# Altium PCB Flowmeter.PcbDoc (part 2 of 2)
Units mm, origin at the board's own origin, x right, y up, seen from the top; angles counter-clockwise.
Board outline 90 x 35 mm, 2 copper layers (Top Layer, Bottom Layer); 44 components, 30 nets, 148 pads, 33 vias.
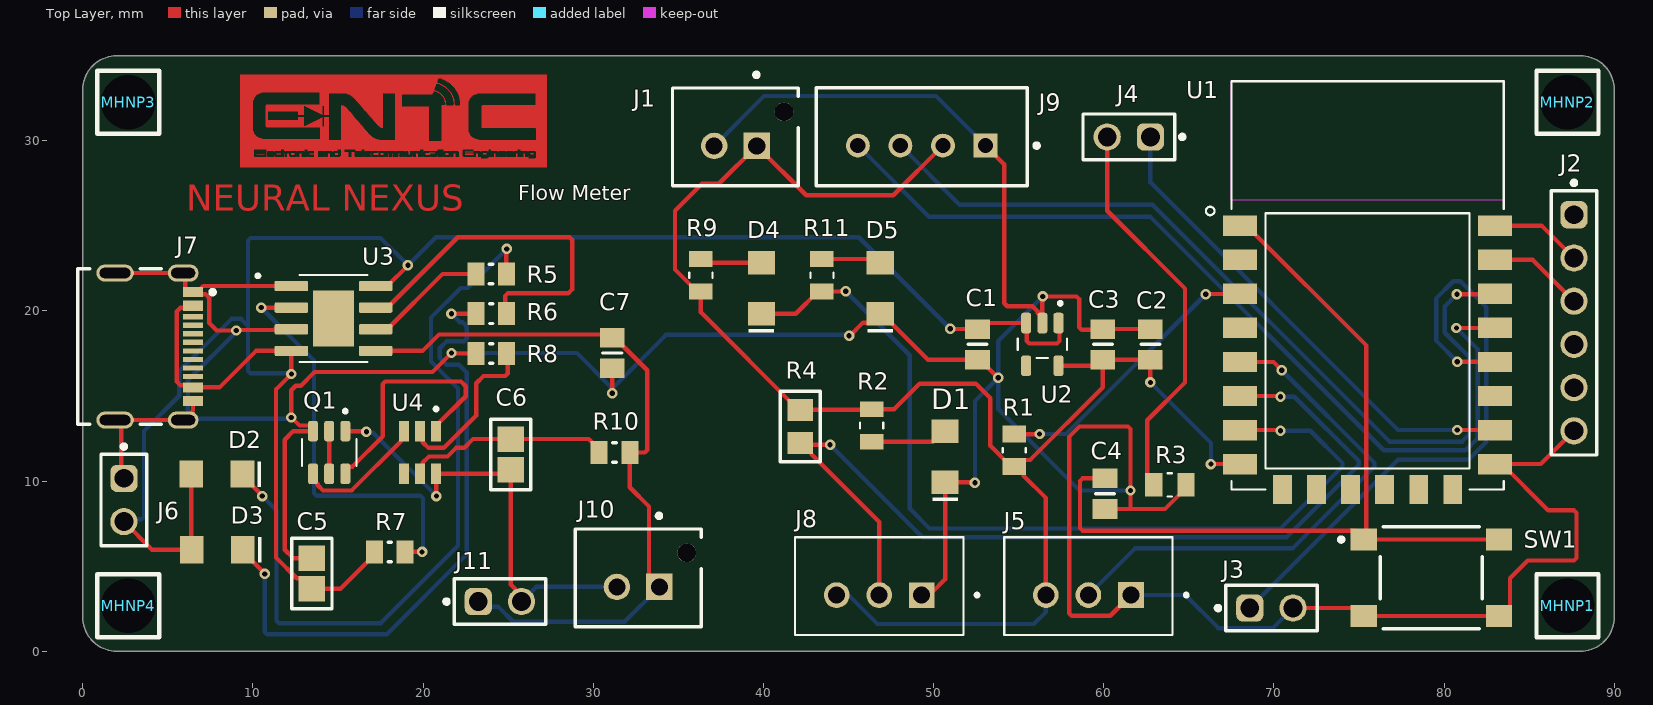
[diagram p0: Top Layer view]

## Via types
v1: diameter 0.61, hole 0.305, Top Layer to Bottom Layer, 33 vias

## Nets (pads, with @x,y where several pads share a name; then routed paths per layer and width w, separated by ;. In a path a pad name is that pad's centre, name@x,y a point inside that pad or via, vN(x,y) a via of type N, cw(c..) or ccw(c..) an arc to the next point about the centre after c; other vN are vias at no path point) (continued)
"VCC 3V3": (continued)
  Top Layer w0.254: J9.2 47.625,26.797 42.508,26.797 J1.1 37.373,27.47 36.381,27.47 34.798,25.886 34.798,22.437 36.092,21.143 R9.2 36.322,19.924 42.062,14.184 R4.2 46.31,14.184 R2.2 47.681,14.229 49.174,15.723 52.48,15.723 53.327,14.876 53.327,12.086 54.552,10.861 R1.1 ; J5.3 56.595,9.003 55.3,10.298 55.3,10.483 54.922,10.861 R1.1 ; U2.5 59.589,16.779 C3.2 ; v1(62.738,15.799) C2.2 ; C2.2@63.336,16.686 62.888,17.134 C2.2 ; v1(66.294,10.998) 66.296,11 U1.8 ; R1.1 55.115,11.239 55.668,11.239 59.944,15.515 C3.2 ; C3.2 C2.2
  Bottom Layer w0.254: J8.3@44.871,3.429 46.7,1.6 55.884,1.6 56.595,2.311 J5.3 ; v1(62.738,15.799) 66.294,12.243 v1(66.294,10.998)
"VCC 5V0": C1.2 C5.2 D2.2 D3.2 J6.2 J7.A4B9 J7.B4A9 R7.1 U2.1 U2.3 U3.4 U3.8 | length 124.8
  Top Layer w0.254: J6.2 4.064,5.969 D3.2 6.374,5.993 D2.2 ; J7.A4B9 6.354,20.188 5.74,20.188 5.517,19.965 5.517,15.849 5.74,15.626 6.354,15.626 J7.B4A9 8.027,15.507 10.173,17.653 U3.4 v1(12.257,16.293) 11.354,15.389 11.354,5.512 12.569,4.297 12.837,4.297 C5.2 15.138,3.671 17.134,5.667 R7.1 ; U3.8 17.892,21.463 19.101,22.672 v1(19.101,22.682) ; v1(50.978,18.948) 50.992,18.934 C1.2 52.933,19.289 U2.3 55.474,19.253 55.474,18.234 55.622,18.085 57.252,18.085 57.4,18.234 57.4,19.227 U2.1
  Bottom Layer w0.254: J6.2 2.543,7.75 3.445,7.75 3.594,7.899 3.594,12.941 5.663,15.01 5.663,16.463 8.733,19.533 9.301,19.533 9.703,19.131 ; v1(12.257,16.293) 12.217,16.332 9.852,16.332 9.703,16.481 9.703,19.131 ; v1(50.978,18.948) 45.593,24.333 20.752,24.333 v1(19.101,22.682) 17.501,24.282 9.852,24.282 9.703,24.134 9.703,19.131
pads on no net: J1. J2.1 J2.4 J2.5 J7.A5 J7.A6 J7.A7 J7.A8 J7.B5 J7.B6 J7.B7 J7.B8 J10. MHNP1. MHNP2. MHNP3. MHNP4. U1.2 U1.4 U1.9 U1.10 U1.11 U1.12 U1.13 U1.14 U1.17 U2.4 U3.9 U4.4

## Other copper
Top Layer:
  region: 12.43,29.246 12.43,29.227 12.43,29.208 12.43,29.188 12.43,29.169 12.276,29.169 12.276,29.188 12.257,29.188 12.257,29.208 12.257,29.227 12.257,29.246 12.257,29.265 12.43,29.265
  region: 20.671,29.265 20.421,29.265 20.421,29.246 20.402,29.246 20.402,29.227 20.402,29.208 20.402,29.188 20.402,29.169 20.152,29.169 20.152,29.188 20.152,29.208 20.152,29.227 20.152,29.246 20.152,29.265 20.363,29.265 20.363,29.285 20.671,29.285
  region: 22.944,29.208 22.944,29.188 22.944,29.169 22.924,29.169 22.924,29.188 22.482,29.188 22.482,29.208 22.482,29.227 22.944,29.227
  region: 22.944,29.342 22.944,29.323 22.482,29.323 22.482,29.342 22.482,29.362 22.944,29.362
  region: 16.955,29.188 16.955,29.169 16.686,29.169 16.686,29.188 16.917,29.188 16.917,29.208 16.955,29.208
  region: 17.648,29.246 17.648,29.227 17.648,29.208 17.648,29.188 17.648,29.169 17.514,29.169 17.514,29.188 17.514,29.208 17.514,29.227 17.514,29.246 17.514,29.265 17.648,29.265
  region: 14.991,29.246 14.991,29.227 14.991,29.208 14.991,29.188 14.991,29.169 14.837,29.169 14.837,29.188 14.837,29.208 14.837,29.227 14.837,29.246 14.837,29.265 14.991,29.265
  region: 26.467,29.246 26.467,29.227 26.467,29.208 26.333,29.208 26.333,29.227 26.333,29.246 26.333,29.265 26.467,29.265
  region: 21.48,29.246 21.48,29.227 21.48,29.208 21.48,29.188 21.48,29.169 21.326,29.169 21.326,29.188 21.326,29.208 21.326,29.227 21.326,29.246 21.326,29.265 21.48,29.265
  region: 567 vertices and 27 holes, not listed, extent 9.253,28.457 27.257,33.887
  region: 23.695,29.246 23.695,29.227 23.695,29.208 23.541,29.208 23.541,29.227 23.541,29.246 23.541,29.265 23.695,29.265
  region: 17.36,29.265 17.36,29.246 17.36,29.227 17.36,29.208 17.36,29.188 17.36,29.169 17.109,29.169 17.109,29.188 17.109,29.208 17.109,29.227 17.109,29.246 17.109,29.265 17.34,29.265 17.34,29.285 17.36,29.285
  text "NEURAL NEXUS" at 6.071,25.883 h1.52

## Silkscreen, mask and mechanical layers (free items; w line width, h text height)
Top Overlay:
  text "Flow Meter" at 25.6,26.214 h1.52
Mechanical 1:
  lines w0.199: 0,32 0,33
  lines w0.2: 0,32 0,2 ccw(c2,2) 2,0 88,0 ccw(c88,2) 90,2 90,33 ccw(c88,33) 88,35 2,35 ccw(c2,33) 0,33